# Altium PCB DIOT_Sampler 20spacin.PCBDOC (part 6 of 8)
Units mm, origin at the board's own origin, x right, y up, seen from the top; angles counter-clockwise.
Board outline 222.37 x 100 mm, 4 copper layers (Top, GP1(GND), L3, Bot), stack 1.648 mm thick; 680 components, 424 nets, 2212 pads, 808 vias.
Unrouted connection lines stored in the file: 327.
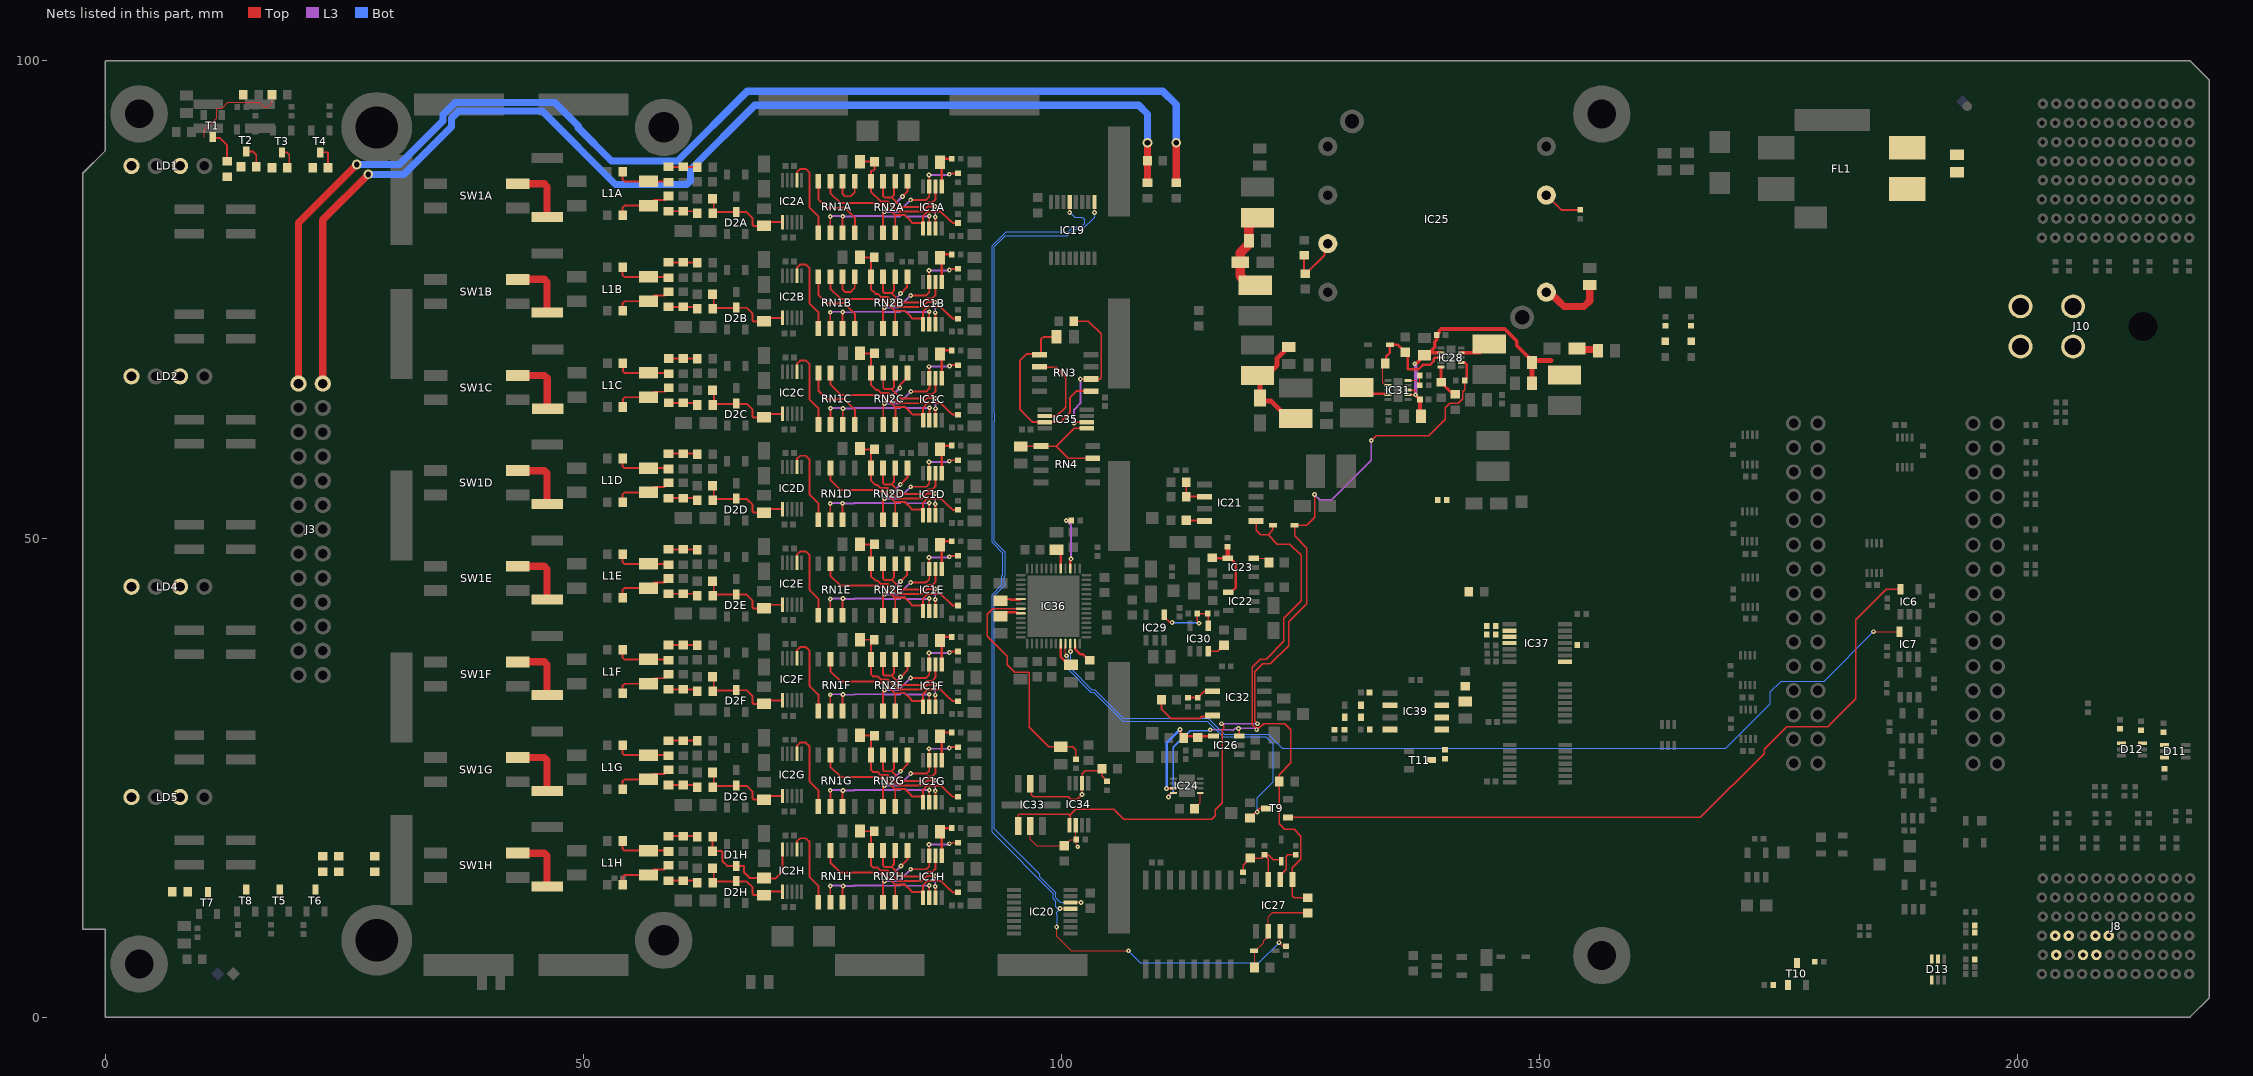
[diagram p7: the nets of this part, all layers, seen from the top]

## Via types
v1: diameter 0.5, hole 0.2, Top to Bot, tented both sides, 765 vias
v2: diameter 0.6, hole 0.3, Top to Bot, tented both sides, 17 vias
v3: diameter 0.5, hole 0.2, Top to Bot, 11 vias
v4: diameter 1, hole 0.6, Top to Bot, tented both sides, 7 vias
v5: diameter 0.6, hole 0.3, Top to Bot, 6 vias
v6: diameter 1.27, hole 0.711, Top to Bot, 2 vias

## Nets (pads, with @x,y where several pads share a name; then routed paths per layer and width w, separated by ;. In a path a pad name is that pad's centre, name@x,y a point inside that pad or via, vN(x,y) a via of type N, cw(c..) or ccw(c..) an arc to the next point about the centre after c; other vN are vias at no path point) (continued)
NetC1H_2: C1H.2 C2H.2 D1H.3 IC2H.10 R3H.2 | length 13.5
  Top w0.203: R3H.2@63.532,18.872 C1H.2@63.532,17.348 64.473,17.348 64.553,17.268 64.553,16.318 65.053,15.818 D1H.3@66.003,15.818 66.772,15.818 66.816,15.774 66.816,15.139 67.415,14.54 C2H.2@68.899,14.54 68.935,14.504 70.118,14.504 70.845,15.231 IC2H.10@70.845,17.517
NetC2A_1: C2A.1 C5A.2 D2A.3 IC2A.1 R10A.2 | length 9.7
  Top w0.203: C5A.2@63.652,85.45 63.652,84.166 65.963,84.166 D2A.3@65.969,84.172 ; D2A.3@66.003,84.206 D2A.3@65.969,84.172 ; IC2A.1@70.845,83.117 69.275,83.117 C2A.1@68.899,82.74 67.819,82.74 67.712,82.848 67.712,83.554 67.094,84.172 D2A.3@65.969,84.172
NetC2B_1: C2B.1 C5B.2 D2B.3 IC2B.1 R10B.2 | length 9.7
  Top w0.203: C5B.2@63.652,75.45 63.652,74.166 65.963,74.166 D2B.3@65.969,74.172 ; D2B.3@66.003,74.206 D2B.3@65.969,74.172 ; IC2B.1@70.845,73.117 69.275,73.117 C2B.1@68.899,72.74 67.819,72.74 67.712,72.848 67.712,73.554 67.094,74.172 D2B.3@65.969,74.172
NetC2C_1: C2C.1 C5C.2 D2C.3 IC2C.1 R10C.2 | length 9.7
  Top w0.203: C5C.2@63.665,65.406 63.665,64.122 65.976,64.122 D2C.3@65.982,64.128 ; D2C.3@66.016,64.162 D2C.3@65.982,64.128 ; IC2C.1@70.858,63.073 69.288,63.073 C2C.1@68.911,62.697 67.832,62.697 67.724,62.804 67.724,63.51 67.106,64.128 D2C.3@65.982,64.128
NetC2D_1: C2D.1 C5D.2 D2D.3 IC2D.1 R10D.2 | length 9.7
  Top w0.203: C5D.2@63.652,55.45 63.652,54.166 65.963,54.166 D2D.3@65.969,54.172 ; D2D.3@66.003,54.206 D2D.3@65.969,54.172 ; IC2D.1@70.845,53.117 69.275,53.117 C2D.1@68.899,52.74 67.819,52.74 67.712,52.848 67.712,53.554 67.094,54.172 D2D.3@65.969,54.172
NetC2E_1: C2E.1 C5E.2 D2E.3 IC2E.1 R10E.2 | length 9.7
  Top w0.203: C5E.2@63.652,45.45 63.652,44.166 65.963,44.166 D2E.3@65.969,44.172 ; D2E.3@66.003,44.206 D2E.3@65.969,44.172 ; IC2E.1@70.845,43.117 69.275,43.117 C2E.1@68.899,42.74 67.819,42.74 67.712,42.848 67.712,43.554 67.094,44.172 D2E.3@65.969,44.172
NetC2F_1: C2F.1 C5F.2 D2F.3 IC2F.1 R10F.2 | length 9.7
  Top w0.203: C5F.2@63.652,35.45 63.652,34.166 65.963,34.166 D2F.3@65.969,34.172 ; D2F.3@66.003,34.206 D2F.3@65.969,34.172 ; IC2F.1@70.845,33.117 69.275,33.117 C2F.1@68.899,32.74 67.819,32.74 67.712,32.848 67.712,33.554 67.094,34.172 D2F.3@65.969,34.172
NetC2G_1: C2G.1 C5G.2 D2G.3 IC2G.1 R10G.2 | length 9.7
  Top w0.203: C5G.2@63.652,25.45 63.652,24.166 65.963,24.166 D2G.3@65.969,24.172 ; D2G.3@66.003,24.206 D2G.3@65.969,24.172 ; IC2G.1@70.845,23.117 69.275,23.117 C2G.1@68.899,22.74 67.819,22.74 67.712,22.848 67.712,23.554 67.094,24.172 D2G.3@65.969,24.172
NetC2H_1: C2H.1 C5H.2 D2H.3 IC2H.1 R10H.2 | length 9.7
  Top w0.203: C5H.2@63.652,15.45 63.652,14.166 65.963,14.166 D2H.3@65.969,14.172 ; D2H.3@66.003,14.206 D2H.3@65.969,14.172 ; IC2H.1@70.845,13.117 69.275,13.117 C2H.1@68.899,12.74 67.819,12.74 67.712,12.848 67.712,13.554 67.094,14.172 D2H.3@65.969,14.172
NetC3A_2: C3A.2 IC1A.3 R7A.2 RN2A.1 RN2A.4 | length 18.6
  Top w0.203: C3A.2@78.939,89.205 C3A.2@78.939,89.455 80.439,89.455 R7A.2@80.464,89.43 80.464,88.655 80.309,88.5 80.094,88.5 RN2A.4@80.094,87.405 80.094,86.325 81.114,85.305 81.864,85.305 v1@82.264,84.905 ; v1(82.314,84.905) v1@82.264,84.905 ; v1(83.389,85.805) 83.904,86.32 RN2A.1@83.904,87.405 ; v1(86.814,84.755) 85.964,84.755 85.439,84.23 82.939,84.23 v1@82.264,84.905 ; v1(86.818,83.659) 86.839,83.638 IC1A.3@86.839,82.459
  L3 w0.203: v1(82.314,84.905) 82.489,84.905 v1(83.389,85.805) ; v1(86.814,84.755) 86.818,84.751 v1(86.818,83.659)
NetC3B_2: C3B.2 IC1B.3 R7B.2 RN2B.1 RN2B.4 | length 18.2
  Top w0.203: C3B.2@78.939,79.455 78.964,79.43 80.414,79.43 80.094,79.11 RN2B.4@80.094,77.405 80.094,76.105 80.573,75.626 80.793,75.626 81.114,75.305 81.864,75.305 v1(82.402,74.768) 82.939,74.23 85.439,74.23 85.964,74.755 v1(86.814,74.755) ; v1(83.189,75.655) 83.839,76.305 83.839,77.34 RN2B.1@83.904,77.405 ; v1(86.818,73.659) 86.839,73.638 IC1B.3@86.839,72.459
  L3 w0.203: v1(82.402,74.768) 82.402,74.868 v1(83.189,75.655) ; v1(86.814,74.755) 86.818,74.751 v1(86.818,73.659)
NetC3C_2: C3C.2 IC1C.3 R7C.2 RN2C.1 RN2C.4 | length 18.1
  Top w0.203: C3C.2@78.952,69.411 78.958,69.405 R7C.2@80.464,69.405 80.107,69.048 RN2C.4@80.107,67.362 80.107,66.08 80.604,65.583 80.805,65.583 81.127,65.261 81.877,65.261 82.952,64.186 85.452,64.186 85.977,64.711 v1(86.827,64.711) ; v1(83.114,65.78) 83.114,66.08 83.917,66.883 RN2C.1@83.917,67.362 ; v1(86.831,63.615) 86.852,63.595 IC1C.3@86.852,62.415
  L3 w0.203: v1(82.264,64.93) v1(83.114,65.78) ; v1(86.827,64.711) 86.831,64.707 v1(86.831,63.615)
NetC3D_2: C3D.2 IC1D.3 R7D.2 RN2D.1 RN2D.4 | length 18.2
  Top w0.203: C3D.2@78.939,59.455 79.039,59.355 R7D.2@80.464,59.355 80.094,58.985 RN2D.4@80.094,57.405 80.094,56.13 80.598,55.626 80.793,55.626 81.114,55.305 81.864,55.305 v1(82.289,54.88) 82.939,54.23 85.439,54.23 85.964,54.755 v1(86.814,54.755) ; v1(83.164,55.68) 83.904,56.42 RN2D.1@83.904,57.405 ; v1(86.818,53.659) 86.839,53.638 IC1D.3@86.839,52.459
  L3 w0.203: v1(82.289,54.88) 82.364,54.88 v1(83.164,55.68) ; v1(86.814,54.755) 86.818,54.751 v1(86.818,53.659)
NetC3E_2: C3E.2 IC1E.3 R7E.2 RN2E.1 RN2E.4 | length 18.3
  Top w0.203: C3E.2@78.939,49.455 78.964,49.43 R7E.2@80.464,49.43 80.094,49.06 RN2E.4@80.094,47.405 80.094,46.105 80.573,45.626 80.793,45.626 81.114,45.305 81.864,45.305 82.939,44.23 85.439,44.23 85.964,44.755 v1(86.814,44.755) ; v1(83.189,45.555) 83.864,46.23 83.864,47.365 RN2E.1@83.904,47.405 ; v1(86.818,43.659) 86.839,43.638 IC1E.3@86.839,42.459
  L3 w0.203: v1(82.364,44.88) 82.514,44.88 v1(83.189,45.555) ; v1(86.814,44.755) 86.818,44.751 v1(86.818,43.659)
NetC3F_2: C3F.2 IC1F.3 R7F.2 RN2F.1 RN2F.4 | length 18.4
  Top w0.203: C3F.2@78.939,39.455 R7F.2@80.439,39.455 80.094,39.11 RN2F.4@80.094,37.405 80.094,35.85 80.318,35.626 80.793,35.626 81.114,35.305 81.864,35.305 82.939,34.23 85.439,34.23 85.964,34.755 v1(86.814,34.755) ; v1(83.189,35.555) 83.904,36.27 RN2F.1@83.904,37.405 ; v1(86.818,33.659) 86.839,33.638 IC1F.3@86.839,32.459
  L3 w0.203: v1(82.499,34.705) 82.499,34.865 v1(83.189,35.555) ; v1(86.814,34.755) 86.818,34.751 v1(86.818,33.659)
NetC3G_2: C3G.2 IC1G.3 R7G.2 RN2G.1 RN2G.4 | length 18.4
  Top w0.203: C3G.2@78.939,29.455 78.964,29.43 R7G.2@80.464,29.43 80.094,29.06 RN2G.4@80.094,27.405 80.094,25.85 80.318,25.626 80.793,25.626 81.114,25.305 81.864,25.305 v1(82.314,24.855) 82.939,24.23 85.439,24.23 85.964,24.755 v1(86.814,24.755) ; v1(83.189,25.705) 83.904,26.42 RN2G.1@83.904,27.405 ; v1(86.818,23.659) 86.839,23.638 IC1G.3@86.839,22.459
  L3 w0.203: v1(82.314,24.855) 82.339,24.855 v1(83.189,25.705) ; v1(86.814,24.755) 86.818,24.751 v1(86.818,23.659)
NetC3H_2: C3H.2 IC1H.3 R7H.2 RN2H.1 RN2H.4 | length 18.3
  Top w0.203: C3H.2@78.964,19.43 R7H.2@80.439,19.43 80.094,19.085 RN2H.4@80.094,17.405 80.094,15.85 80.318,15.626 80.793,15.626 81.114,15.305 81.864,15.305 82.939,14.23 85.439,14.23 85.964,14.755 v1(86.814,14.755) ; v1(83.239,15.805) 83.904,16.47 RN2H.1@83.904,17.405 ; v1(86.818,13.659) 86.839,13.638 IC1H.3@86.839,12.459
  L3 w0.203: v1(82.264,14.955) 82.389,14.955 v1(83.239,15.805) ; v1(86.814,14.755) 86.818,14.751 v1(86.818,13.659)
NetC12A_2: C12A.2 IC1A.5 R13A.2 | length 4
  Top w0.254: IC1A.5@87.489,86.859 87.489,89.205 C12A.2@87.314,89.38 87.689,89.755 R13A.2@88.544,89.755
NetC12B_2: C12B.2 IC1B.5 R13B.2 | length 4
  Top w0.254: IC1B.5@87.489,76.859 87.489,79.205 C12B.2@87.314,79.38 87.689,79.755 R13B.2@88.544,79.755
NetC12C_2: C12C.2 IC1C.5 R13C.2 | length 4
  Top w0.254: IC1C.5@87.502,66.815 87.502,69.161 C12C.2@87.327,69.336 87.702,69.711 R13C.2@88.557,69.711
NetC12D_2: C12D.2 IC1D.5 R13D.2 | length 4
  Top w0.254: IC1D.5@87.489,56.859 87.489,59.205 C12D.2@87.314,59.38 87.689,59.755 R13D.2@88.544,59.755
NetC12E_2: C12E.2 IC1E.5 R13E.2 | length 4
  Top w0.254: IC1E.5@87.489,46.859 87.489,49.205 C12E.2@87.314,49.38 87.689,49.755 R13E.2@88.544,49.755
NetC12F_2: C12F.2 IC1F.5 R13F.2 | length 4
  Top w0.254: IC1F.5@87.489,36.859 87.489,39.205 C12F.2@87.314,39.38 87.689,39.755 R13F.2@88.544,39.755
NetC12G_2: C12G.2 IC1G.5 R13G.2 | length 4
  Top w0.254: IC1G.5@87.489,26.859 87.489,29.205 C12G.2@87.314,29.38 87.689,29.755 R13G.2@88.544,29.755
NetC12H_2: C12H.2 IC1H.5 R13H.2 | length 4
  Top w0.254: IC1H.5@87.489,16.859 87.489,19.205 C12H.2@87.314,19.38 87.689,19.755 R13H.2@88.544,19.755
NetC40_1: C40.1 IC21.4 | length 1.9
  Top w0.203: C40.1@113.064,51.93 114.908,51.93 IC21.4@114.963,51.874
NetC42_1: C42.1 IC23.3 | length 1.8
  Top w0.127: IC23.3@120.114,47.969 121.298,47.969 121.71,47.557 C42.1@121.71,47.535
NetC46_1: C46.1 IC24.5 | length 1.9
  Top w0.127: C46.1@113.939,21.78 113.939,21.805 114.539,22.405 IC24.5@114.539,23.434
NetC49_2: C49.2 C50.1 L2.2 L3.1 | length 8.8
  Top w1.016: L3.1@120.264,76.53 119.639,76.53 118.714,77.455 C50.1@118.714,78.93 118.714,79.93 119.614,80.83 C49.2@119.614,81.18 119.614,82.68 L2.2@120.514,83.58
NetC52_1: C52.1 C53.2 C54.2 C55.2 C56.2 C73.2 C74.2 C85.2 C86.2 IC25.1 IC28.2 IC31.2 L4.2 | length 39.2
  Top w0.152: IC31.2@136.261,65.07 v1(137.051,65.07) 137.051,65.48 136.961,65.57 136.261,65.57
  Top w0.381: v1(136.961,68.32) 137.093,68.32 C74.2@137.979,69.205 138.215,69.205 C74.2@138.474,69.465 ; v1(137.051,65.07) 137.051,65.03 C85.2@137.511,64.57 137.511,62.92 C86.2@137.611,62.82 ; IC28.2@139.712,69.465 C74.2@138.474,69.465 ; C55.2@149.223,68.451 149.223,68.626 147.63,70.219 147.63,70.689 146.372,71.947 139.719,71.947 139.533,71.761 139.533,71.592 C73.2@139.261,71.32 139.261,70.845 139.045,70.629 139.045,70.036 C74.2@138.474,69.465
  Top w0.508: C56.2@149.223,66.292 C55.2@149.223,68.451 149.435,68.663 151.23,68.663
  Top w0.762: IC25.1@150.724,75.795 151.059,75.795 152.005,74.849 152.028,74.849 152.566,74.31 154.663,74.31 155.264,74.911 C53.2@155.264,76.53 ; C52.1@153.643,69.93 C52.1@153.918,69.93 154.043,69.805 155.989,69.805 C54.2@156.114,69.68
  L3 w0.381: v1(136.961,68.32) 136.961,68.287 137.051,68.197 v1(137.051,65.07)
NetC59_2: C59.2 C60.2 L5.2 L6.1 | length 12
  Top w0.508: L6.1@120.514,67.08 L6.1@121.014,67.08 ; C59.2@123.764,70.08 122.564,68.88 122.564,68.18 121.464,67.08 L6.1@121.014,67.08 ; L5.2@124.514,62.58 123.764,62.58 121.914,64.43 121.064,64.43 C60.2@120.764,64.73 120.764,66.83 L6.1@121.014,67.08
NetC65_2: C65.2 D7.2 IC27.3 R59.2 R62.2 | length 8.1
  Top w0.152: R62.2@119.014,15.15 119.014,15.88 C65.2@119.764,16.63 120.934,16.63 R59.2@121.264,16.96 ; IC27.3@121.629,14.38 121.629,16.565 121.289,16.905 121.689,16.905 122.164,16.43 122.874,16.43 D7.2@123.014,16.29
NetC66_2: C66.2 D8.2 IC28.3 IC31.7 R64.1 | length 13.1
  Top w0.127: R64.1@133.861,68.345 133.886,68.32 133.948,68.32 134.011,68.32 133.948,68.257 133.62,67.929 133.62,66.341 133.805,66.156 134.074,66.156 IC31.7@134.161,66.07
  Top w0.254: R64.1@133.861,68.345 133.923,68.407 133.968,68.452 133.968,69.077 134.358,69.467 134.358,70.313 D8.2@134.351,70.32 ; D8.2@134.358,70.32 135.161,70.32 C66.2@135.961,69.52 136.211,69.27 136.211,67.82 136.288,67.743 137.346,67.743 137.803,68.199 138.557,68.199 138.933,68.575 138.933,68.82 139.078,68.965 IC28.3@139.712,68.965
NetC72_2: C72.2 D9.2 IC27.6 R67.1 | length 10.5
  Top w0.127: C72.2@120.214,5.18 120.214,6.84 D9.2@120.124,6.93 120.289,6.93 121.149,7.79 121.149,7.962 121.407,8.221 121.58,8.221 121.629,8.27 IC27.6@121.629,8.98 121.629,10.47 122.039,10.88
  Top w0.152: 122.039,10.88 R67.1@125.764,10.88
NetC75_1: C75.1 IC30.3 | length 1.9
  Top w0.152: IC30.3@115.365,38.229 116.363,38.229 C75.1@117.014,38.88
NetC82_1: C82.1 IC32.4 | length 6.9
  Top w0.203: C82.1@110.464,33.18 110.464,32.23 111.493,31.201 114.462,31.201 114.691,31.43 115.719,31.43 IC32.4@115.814,31.525
NetC95_2: C95.2 IC36.22 | length 2.4
  Top w0.254: IC36.22@99.934,39.04 99.934,37.661 100.319,37.275 100.663,37.275 C95.2@100.78,37.158
NetC96_2: C96.2 IC36.9 | length 2.3
  Top w0.254: C96.2@93.639,41.916 94.034,42.311 95.318,42.311 95.414,42.215 IC36.9@95.759,42.215
NetC97_2: C97.2 IC36.6 | length 2.3
  Top w0.254: C97.2@93.639,43.545 93.809,43.715 94.625,43.715 94.705,43.635 95.679,43.635 IC36.6@95.759,43.715
NetC98_2: C98.2 IC36.45 | length 2.2
  Top w0.254: C98.2@99.485,48.871 99.934,48.421 IC36.45@99.934,46.89
NetC99_2: C99.2 IC36.8 R81.2 | length 25
  Top w0.152: IC36.8@95.759,42.715 94.81,42.715 94.764,42.67 92.83,42.67 92.264,42.104 92.264,39.821 94.367,37.718 94.367,36.827 95.134,36.06 96.535,36.06 96.654,35.941 96.654,30.29 98.692,28.252 C99.2@99.944,28.252 101.192,28.252 101.518,27.926 R81.2@101.518,26.958
NetC101_2: C101.2 IC33.2 IC34.2 R80.2 | length 9.1
  Top w0.127: IC33.2@96.764,19.984 96.764,18.585 97.433,17.916 100.309,17.916 100.721,18.328 100.721,18.353 100.931,18.563 R80.2@101.434,18.563 ; IC34.2@101.514,20.055 101.514,18.643 R80.2@101.434,18.563 ; v1(101.714,17.809) 101.714,17.91 101.582,18.042 R80.2@101.582,18.563 R80.2@101.434,18.563
NetC102_2: C102.2 IC33.6 IC34.6 R82.1 | length 12.9
  Top w0.152: IC33.6@96.764,24.384 96.871,24.277 96.871,23.261 97.096,23.036 100.716,23.036 100.985,22.767 101.67,22.767 v1(102.164,23.261) IC34.6@102.164,24.455 102.164,25.416 102.514,25.766 104.071,25.766 C102.2@104.264,25.959 104.264,25.18 104.769,24.675 R82.1@104.789,24.675 R82.1@104.809,24.675
NetC103_2: C103.2 IC35.3 RN3.1 RN3.5 | length 21.1
  Top w0.203: C103.2@99.514,71.13 98.139,71.13 97.864,70.855 97.864,69.41 RN3.5@97.714,69.26 97.644,69.33 96.339,69.33 95.66,68.651 95.66,63.559 97.014,62.205 IC35.3@98.264,62.205 99.864,62.205 100.914,63.255 100.914,64.805 101.559,65.45 RN3.1@103.114,65.45
NetC106_2: C106.2 IC35.5 RN4.3 RN4.5 | length 12
  Top w0.152: C106.2@95.764,59.68 99.464,59.68 ; IC35.5@102.664,61.555 101.339,61.555 99.464,59.68 ; RN4.3@103.289,58.44 100.704,58.44 99.464,59.68
NetC109_2: C109.2 IC39.6 IC39.7 R112.2
NetC111_2: C111.2 IC39.5
NetC112_2: C112.2 D15.1 R113.2
NetC116_1: C116.1 FL1.3 J10.1 J10.2
NetC116_2: C116.2 FL1.1 J10.3 J10.4
NetD10_1: D10.1 IC28.7 IC33.1 IC34.1 R69.1 R157.1 | length 93
  Top w0.152: IC33.1@95.494,19.984 95.494,21.134 95.583,21.223 100.72,21.223 100.913,21.03 ; IC34.1@100.913,20.128 100.913,21.03 ; v1(116.764,30.68) 116.987,30.457 116.987,30.158 116.85,30.022 116.85,22.419 116.088,21.656 116.088,21.03 115.752,20.694 106.536,20.694 105.5,21.73 101.493,21.73 100.913,21.151 100.913,21.03 ; v1(120.514,30.68) 120.514,30.722 120.236,31 120.236,36.116 121.07,36.95 121.87,36.95 123.764,38.844 123.764,41.327 125.67,43.233 125.67,49.04 124.404,50.306 D10.1@124.404,51.43 125.666,51.43 126.522,52.286 126.522,54.586 v1(126.473,54.634) ; v1(132.411,60.279) 132.431,60.279 132.944,60.792 138.439,60.792 140.164,62.517 140.164,63.71 140.627,64.173 141.501,64.173 141.99,64.661 141.99,65.403 142.181,65.594 R69.1@142.181,66.57
  Top w0.254: IC28.7@141.812,68.465 142.181,68.465 142.181,68.431 142.244,68.369 142.268,68.369 142.416,68.22 142.416,66.805 R69.1@142.181,66.57
  L3 w0.152: v1(116.764,30.68) v1(120.514,30.68) ; v1(126.473,54.634) 127.003,54.105 128.29,54.105 132.411,58.226 v1(132.411,60.279)
NetD10_2: D10.2 IC21.5 IC24.4 IC26.3 IC27.1 R53.1 R67.2 | length 71.2
  Top w0.152: v1(111.197,23.023) 111.197,23.117 111.514,23.434 IC24.4@111.739,23.434 ; v1(118.514,30.18) 118.614,30.08 IC26.3@118.614,29.38 ; IC21.5@120.363,51.874 120.363,50.903 120.836,50.43 121.614,50.43 ; D10.2@122.124,51.43 122.124,50.94 121.614,50.43 ; R67.2@126.014,12.73 R67.2@125.764,12.48 124.364,12.48 124.169,12.675 IC27.1@124.169,14.38 124.169,15.635 125.027,16.493 125.027,18.917 124.332,19.612 123.382,19.612 122.789,20.205 122.789,21.505 R53.1@122.789,24.63 122.789,25.355 124.014,26.58 124.014,30.03 123.364,30.68 121.155,30.68 120.702,30.227 120.326,30.227 119.967,30.586 119.967,30.873 119.956,30.884 119.956,36.588 120.798,37.43 121.414,37.43 123.272,39.288 123.272,41.292 123.272,41.688 125.098,43.514 125.098,48.266 123.9,49.464 122.58,49.464 121.614,50.43
  L3 w0.152: v1(115.569,30.032) 117.821,30.032 117.856,29.997 117.983,29.997 118.166,30.18 v1(118.514,30.18) 120.279,30.18 120.406,30.053 v1(120.43,30.053)
  Bot w0.152: v1(111.197,23.023) 111.723,23.549 111.723,28.189 113.473,29.939 115.48,29.939 115.569,30.029 v1(115.569,30.032)
NetD11_4: D11.4 J8.H2 R93.2
NetD11_6: D11.6 J8.K2 R98.2
NetD12_3: D12.3 J8.H3 R48.2
NetD12_4: D12.4 J8.I2 R95.2
NetD13_1: D13.1 J8.G3 R92.2
NetD13_5: D13.5 J8.K3 R97.2
NetD13_6: D13.6 J8.J3 R96.2
NetD14_2: D14.2 D15.2 IC39.2
NetIC1A_1: IC1A.1 R6A.1 RN1A.7 RN2A.7 | length 19.7
  Top w0.203: RN1A.7@75.858,87.407 75.858,86.161 76.914,85.105 80.847,85.105 80.977,84.975 81.48,84.975 82.634,83.82 ; RN2A.7@82.634,82.005 82.634,83.82 ; IC1A.1@85.539,82.459 IC1A.1@85.539,83.056 ; R6A.1@89.173,83.036 88.643,83.036 88.423,83.256 88.363,83.256 87.385,84.234 85.991,84.234 85.539,83.782 IC1A.1@85.539,83.056 ; 82.634,83.82 82.673,83.859 83.637,83.859 84.235,83.261 84.235,83.22 84.399,83.056 IC1A.1@85.539,83.056
NetIC1A_2: IC1A.2 RN1A.2 RN1A.3 | length 15
  Top w0.203: v1(75.839,83.705) 75.839,82.027 RN1A.2@75.858,82.007 ; RN1A.3@77.128,82.007 77.128,83.719 v1(77.139,83.73) ; IC1A.2@86.189,82.459 v1(86.189,83.755)
  L3 w0.203: v1(75.839,83.705) 75.889,83.755 76.862,83.755 ; v1@77.139,83.701 78.31,83.701 78.364,83.755 81.273,83.755 81.301,83.727 83.109,83.727 83.241,83.859 83.637,83.859 83.769,83.727 86.161,83.727 v1(86.189,83.755)
NetIC1A_6: IC1A.6 RN2A.2 RN2A.3 | length 11.1
  Top w0.203: RN2A.3@81.364,87.405 81.364,85.84 81.499,85.705 82.249,85.705 ; RN2A.2@82.634,87.405 82.499,87.27 82.499,85.955 82.249,85.705 ; IC1A.6@86.839,86.859 86.839,85.484 86.514,85.159 86.035,85.159 85.961,85.085 85.827,85.085 85.447,84.705 83.249,84.705 82.249,85.705
NetIC1A_7: IC1A.7 R12A.1 RN2A.6 | length 13
  Top w0.203: RN2A.6@81.364,82.005 81.364,84.07 v1(81.499,84.205) ; v1(84.249,85.455) 85.864,85.455 86.189,85.78 IC1A.7@86.189,86.859 86.189,88.03 v1(86.164,88.055) ; v1(88.289,88.13) 88.385,88.226 R12A.1@89.173,88.226
  L3 w0.203: v1(81.499,84.205) 82.999,84.205 v1(84.249,85.455) ; v1(86.164,88.055) 88.214,88.055 v1(88.289,88.13)
NetIC1B_1: IC1B.1 R6B.1 RN1B.7 RN2B.7 | length 19.7
  Top w0.203: RN1B.7@75.858,77.407 75.858,76.161 76.914,75.105 80.847,75.105 80.977,74.975 81.48,74.975 82.634,73.82 ; RN2B.7@82.634,72.005 82.634,73.82 ; IC1B.1@85.539,72.459 IC1B.1@85.539,73.056 ; R6B.1@89.173,73.036 88.643,73.036 88.423,73.256 88.363,73.256 87.385,74.234 85.991,74.234 85.539,73.782 IC1B.1@85.539,73.056 ; 82.634,73.82 82.673,73.859 83.637,73.859 84.235,73.261 84.235,73.22 84.399,73.056 IC1B.1@85.539,73.056
NetIC1B_2: IC1B.2 RN1B.2 RN1B.3 | length 15
  Top w0.203: v1(75.839,73.705) 75.839,72.027 RN1B.2@75.858,72.007 ; RN1B.3@77.128,72.007 77.128,73.719 v1(77.139,73.73) ; IC1B.2@86.189,72.459 v1(86.189,73.755)
  L3 w0.203: v1(75.839,73.705) 75.889,73.755 76.862,73.755 ; v1@77.139,73.701 78.31,73.701 78.364,73.755 81.273,73.755 81.301,73.727 83.109,73.727 83.241,73.859 83.637,73.859 83.769,73.727 86.161,73.727 v1(86.189,73.755)
NetIC1B_6: IC1B.6 RN2B.2 RN2B.3 | length 11.1
  Top w0.203: RN2B.3@81.364,77.405 81.364,75.84 81.499,75.705 82.249,75.705 ; RN2B.2@82.634,77.405 82.499,77.27 82.499,75.955 82.249,75.705 ; IC1B.6@86.839,76.859 86.839,75.484 86.514,75.159 86.035,75.159 85.961,75.085 85.827,75.085 85.447,74.705 83.249,74.705 82.249,75.705
NetIC1B_7: IC1B.7 R12B.1 RN2B.6 | length 13
  Top w0.203: RN2B.6@81.364,72.005 81.364,74.07 v1(81.499,74.205) ; v1(84.249,75.455) 85.864,75.455 86.189,75.78 86.189,78.03 v1(86.164,78.055) ; v1(88.289,78.13) 88.385,78.226 R12B.1@89.173,78.226
  L3 w0.203: v1(81.499,74.205) 82.999,74.205 v1(84.249,75.455) ; v1(86.164,78.055) 88.214,78.055 v1(88.289,78.13)
NetIC1C_1: IC1C.1 R6C.1 RN1C.7 RN2C.7 | length 19.7
  Top w0.203: RN1C.7@75.871,67.363 75.871,66.117 76.927,65.061 80.86,65.061 80.99,64.931 81.493,64.931 82.647,63.777 ; RN2C.7@82.647,61.962 82.647,63.777 ; IC1C.1@85.552,62.415 IC1C.1@85.552,63.012 ; R6C.1@89.186,62.992 88.656,62.992 88.436,63.212 88.375,63.212 87.398,64.19 86.003,64.19 85.552,63.738 IC1C.1@85.552,63.012 ; 82.647,63.777 82.685,63.815 83.65,63.815 84.247,63.217 84.247,63.176 84.411,63.012 IC1C.1@85.552,63.012
NetIC1C_2: IC1C.2 RN1C.2 RN1C.3 | length 14.9
  Top w0.203: v1(75.852,63.661) 75.852,61.983 RN1C.2@75.871,61.963 ; RN1C.3@77.141,61.963 77.141,63.607 v1(77.164,63.63) ; IC1C.2@86.202,62.415 v1(86.202,63.711)
  L3 w0.203: v1(75.852,63.661) 75.902,63.711 76.875,63.711 ; v1@77.164,63.658 78.323,63.658 78.377,63.711 81.286,63.711 81.314,63.683 83.122,63.683 83.253,63.815 83.65,63.815 83.782,63.683 86.173,63.683 v1(86.202,63.711)
NetIC1C_6: IC1C.6 RN2C.2 RN2C.3 | length 11.1
  Top w0.203: RN2C.3@81.377,67.362 81.377,65.797 81.512,65.662 82.262,65.662 ; RN2C.2@82.647,67.362 82.512,67.227 82.512,65.912 82.262,65.662 ; IC1C.6@86.852,66.815 86.852,65.44 86.527,65.115 86.047,65.115 85.974,65.041 85.84,65.041 85.46,64.662 83.262,64.662 82.262,65.662
NetIC1C_7: IC1C.7 R12C.1 RN2C.6 | length 13
  Top w0.203: RN2C.6@81.377,61.962 81.377,64.027 v1(81.512,64.162) ; v1(84.262,65.412) 85.877,65.412 86.202,65.736 IC1C.7@86.202,66.815 86.202,67.986 v1(86.177,68.011) ; v1(88.302,68.086) 88.398,68.182 R12C.1@89.186,68.182
  L3 w0.203: v1(81.512,64.162) 83.012,64.162 v1(84.262,65.412) ; v1(86.177,68.011) 88.227,68.011 v1(88.302,68.086)
NetIC1D_1: IC1D.1 R6D.1 RN1D.7 RN2D.7 | length 19.7
  Top w0.203: RN1D.7@75.858,57.407 75.858,56.161 76.914,55.105 80.847,55.105 80.977,54.975 81.48,54.975 82.634,53.82 ; RN2D.7@82.634,52.005 82.634,53.82 ; IC1D.1@85.539,52.459 IC1D.1@85.539,53.056 ; R6D.1@89.173,53.036 88.643,53.036 88.423,53.256 88.363,53.256 87.385,54.234 85.991,54.234 85.539,53.782 IC1D.1@85.539,53.056 ; 82.634,53.82 82.673,53.859 83.637,53.859 84.235,53.261 84.235,53.22 84.399,53.056 IC1D.1@85.539,53.056
NetIC1D_2: IC1D.2 RN1D.2 RN1D.3 | length 15
  Top w0.203: v1(75.839,53.705) 75.839,52.027 RN1D.2@75.858,52.007 ; v1(77.114,53.73) 77.128,53.716 RN1D.3@77.128,52.007 ; IC1D.2@86.189,52.459 v1(86.189,53.755)
  L3 w0.203: v1(75.839,53.705) 75.889,53.755 76.862,53.755 ; v1@77.114,53.701 78.31,53.701 78.364,53.755 81.273,53.755 81.301,53.727 83.109,53.727 83.241,53.859 83.637,53.859 83.769,53.727 86.161,53.727 v1(86.189,53.755)
NetIC1D_6: IC1D.6 RN2D.2 RN2D.3 | length 11.1
  Top w0.203: RN2D.3@81.364,57.405 81.364,55.84 81.499,55.705 82.249,55.705 ; RN2D.2@82.634,57.405 82.499,57.27 82.499,55.955 82.249,55.705 ; IC1D.6@86.839,56.859 86.839,55.484 86.514,55.159 86.035,55.159 85.961,55.085 85.827,55.085 85.447,54.705 83.249,54.705 82.249,55.705
NetIC1D_7: IC1D.7 R12D.1 RN2D.6 | length 13
  Top w0.203: RN2D.6@81.364,52.005 81.364,54.07 v1(81.499,54.205) ; v1(84.249,55.455) 85.864,55.455 86.189,55.78 86.189,58.03 v1(86.164,58.055) ; v1(88.289,58.13) 88.385,58.226 R12D.1@89.173,58.226
  L3 w0.203: v1(81.499,54.205) 82.999,54.205 v1(84.249,55.455) ; v1(86.164,58.055) 88.214,58.055 v1(88.289,58.13)
NetIC1E_1: IC1E.1 R6E.1 RN1E.7 RN2E.7 | length 19.7
  Top w0.203: RN1E.7@75.858,47.407 75.858,46.161 76.914,45.105 80.847,45.105 80.977,44.975 81.48,44.975 82.634,43.82 ; RN2E.7@82.634,42.005 82.634,43.82 ; IC1E.1@85.539,42.459 IC1E.1@85.539,43.056 ; R6E.1@89.173,43.036 88.643,43.036 88.423,43.256 88.363,43.256 87.385,44.234 85.991,44.234 85.539,43.782 IC1E.1@85.539,43.056 ; 82.634,43.82 82.673,43.859 83.637,43.859 84.235,43.261 84.235,43.22 84.399,43.056 IC1E.1@85.539,43.056
NetIC1E_2: IC1E.2 RN1E.2 RN1E.3 | length 15.1
  Top w0.203: v1(75.839,43.705) 75.839,42.027 RN1E.2@75.858,42.007 ; RN1E.3@77.128,42.007 77.128,43.719 v1(77.164,43.755) ; IC1E.2@86.189,42.459 v1(86.189,43.755)
  L3 w0.203: v1(75.839,43.705) 75.889,43.755 76.862,43.755 76.916,43.701 ; v1@77.164,43.701 78.31,43.701 78.364,43.755 81.273,43.755 81.301,43.727 83.109,43.727 83.241,43.859 83.637,43.859 83.769,43.727 86.161,43.727 v1(86.189,43.755)
NetIC1E_6: IC1E.6 RN2E.2 RN2E.3 | length 11.1
  Top w0.203: RN2E.3@81.364,47.405 81.364,45.84 81.499,45.705 82.249,45.705 ; RN2E.2@82.634,47.405 82.499,47.27 82.499,45.955 82.249,45.705 ; IC1E.6@86.839,46.859 86.839,45.484 86.514,45.159 86.035,45.159 85.961,45.085 85.827,45.085 85.447,44.705 83.249,44.705 82.249,45.705
NetIC1E_7: IC1E.7 R12E.1 RN2E.6 | length 13
  Top w0.203: RN2E.6@81.364,42.005 81.364,44.07 v1(81.499,44.205) ; v1(84.249,45.455) 85.864,45.455 86.189,45.78 86.189,48.03 v1(86.164,48.055) ; v1(88.289,48.13) 88.385,48.226 R12E.1@89.173,48.226
  L3 w0.203: v1(81.499,44.205) 82.999,44.205 v1(84.249,45.455) ; v1(86.164,48.055) 88.214,48.055 v1(88.289,48.13)
NetIC1F_1: IC1F.1 R6F.1 RN1F.7 RN2F.7 | length 19.7
  Top w0.203: RN1F.7@75.858,37.407 75.858,36.161 76.914,35.105 80.847,35.105 80.977,34.975 81.48,34.975 82.634,33.82 ; RN2F.7@82.634,32.005 82.634,33.82 ; IC1F.1@85.539,32.459 IC1F.1@85.539,33.056 ; R6F.1@89.173,33.036 88.643,33.036 88.423,33.256 88.363,33.256 87.385,34.234 85.991,34.234 85.539,33.782 IC1F.1@85.539,33.056 ; 82.634,33.82 82.673,33.859 83.637,33.859 84.235,33.261 84.235,33.22 84.399,33.056 IC1F.1@85.539,33.056
NetIC1F_2: IC1F.2 RN1F.2 RN1F.3 | length 15
  Top w0.203: v1(75.839,33.705) 75.839,32.027 RN1F.2@75.858,32.007 ; RN1F.3@77.128,32.007 77.128,33.694 v1(77.164,33.73) ; IC1F.2@86.189,32.459 v1(86.189,33.755)
  L3 w0.203: v1(75.839,33.705) 75.889,33.755 76.862,33.755 76.916,33.701 ; v1@77.164,33.701 78.31,33.701 78.364,33.755 81.273,33.755 81.301,33.727 83.109,33.727 83.241,33.859 83.637,33.859 83.769,33.727 86.161,33.727 v1(86.189,33.755)
NetIC1F_6: IC1F.6 RN2F.2 RN2F.3 | length 11.1
  Top w0.203: RN2F.3@81.364,37.405 81.364,35.84 81.499,35.705 82.249,35.705 ; RN2F.2@82.634,37.405 82.499,37.27 82.499,35.955 82.249,35.705 ; IC1F.6@86.839,36.859 86.839,35.484 86.514,35.159 86.035,35.159 85.961,35.085 85.827,35.085 85.447,34.705 83.249,34.705 82.249,35.705
NetIC1F_7: IC1F.7 R12F.1 RN2F.6 | length 13
  Top w0.203: RN2F.6@81.364,32.005 81.364,34.07 v1(81.499,34.205) ; v1(84.249,35.455) 85.864,35.455 86.189,35.78 IC1F.7@86.189,36.859 86.189,38.03 v1(86.164,38.055) ; v1(88.289,38.13) 88.385,38.226 R12F.1@89.173,38.226
  L3 w0.203: v1(81.499,34.205) 82.999,34.205 v1(84.249,35.455) ; v1(86.164,38.055) 88.214,38.055 v1(88.289,38.13)
NetIC1G_1: IC1G.1 R6G.1 RN1G.7 RN2G.7 | length 19.7
  Top w0.203: RN1G.7@75.858,27.407 75.858,26.161 76.914,25.105 80.847,25.105 80.977,24.975 81.48,24.975 82.634,23.82 ; RN2G.7@82.634,22.005 82.634,23.82 ; IC1G.1@85.539,22.459 IC1G.1@85.539,23.056 ; R6G.1@89.173,23.036 88.643,23.036 88.423,23.256 88.363,23.256 87.385,24.234 85.991,24.234 85.539,23.782 IC1G.1@85.539,23.056 ; 82.634,23.82 82.673,23.859 83.637,23.859 84.235,23.261 84.235,23.22 84.399,23.056 IC1G.1@85.539,23.056
NetIC1G_2: IC1G.2 RN1G.2 RN1G.3 | length 15.3
  Top w0.203: v1(75.839,23.705) 75.868,23.676 75.868,22.757 75.839,22.728 75.839,22.027 RN1G.2@75.858,22.007 ; RN1G.3@77.128,22.007 77.128,23.666 v1(77.164,23.701) ; IC1G.2@86.189,22.459 v1(86.189,23.755)
  L3 w0.203: v1(75.839,23.705) 75.889,23.755 76.862,23.755 76.916,23.701 v1(77.164,23.701) 78.31,23.701 78.364,23.755 81.273,23.755 81.301,23.727 83.109,23.727 83.241,23.859 83.637,23.859 83.769,23.727 86.161,23.727 v1(86.189,23.755)
NetIC1G_6: IC1G.6 RN2G.2 RN2G.3 | length 11.1
  Top w0.203: RN2G.3@81.364,27.405 81.364,25.84 81.499,25.705 82.249,25.705 ; RN2G.2@82.634,27.405 82.499,27.27 82.499,25.955 82.249,25.705 ; IC1G.6@86.839,26.859 86.839,25.484 86.514,25.159 86.035,25.159 85.961,25.085 85.827,25.085 85.447,24.705 83.249,24.705 82.249,25.705
NetIC1G_7: IC1G.7 R12G.1 RN2G.6 | length 13
  Top w0.203: RN2G.6@81.364,22.005 81.364,24.07 v1(81.499,24.205) ; v1(84.249,25.455) 85.864,25.455 86.189,25.78 86.189,28.03 v1(86.164,28.055) ; v1(88.289,28.13) 88.385,28.226 R12G.1@89.173,28.226
  L3 w0.203: v1(81.499,24.205) 82.999,24.205 v1(84.249,25.455) ; v1(86.164,28.055) 88.214,28.055 v1(88.289,28.13)
NetIC1H_1: IC1H.1 R6H.1 RN1H.7 RN2H.7 | length 19.7
  Top w0.203: RN1H.7@75.858,17.407 75.858,16.161 76.914,15.105 80.847,15.105 80.977,14.975 81.48,14.975 82.634,13.82 ; RN2H.7@82.634,12.005 82.634,13.82 ; IC1H.1@85.539,12.459 IC1H.1@85.539,13.056 ; R6H.1@89.173,13.036 88.643,13.036 88.423,13.256 88.363,13.256 87.385,14.234 85.991,14.234 85.539,13.782 IC1H.1@85.539,13.056 ; 82.634,13.82 82.673,13.859 83.637,13.859 84.235,13.261 84.235,13.22 84.399,13.056 IC1H.1@85.539,13.056
NetIC1H_2: IC1H.2 RN1H.2 RN1H.3 | length 15.3
  Top w0.203: v1(75.839,13.705) 75.839,12.027 RN1H.2@75.858,12.007 ; RN1H.3@77.128,12.007 77.128,13.641 v1(77.189,13.701) ; IC1H.2@86.189,12.459 v1(86.189,13.755)
  L3 w0.203: v1(75.839,13.705) 75.889,13.755 76.862,13.755 76.916,13.701 v1(77.189,13.701) 78.31,13.701 78.364,13.755 81.273,13.755 81.301,13.727 83.109,13.727 83.241,13.859 83.637,13.859 83.769,13.727 86.161,13.727 v1(86.189,13.755)
NetIC1H_6: IC1H.6 RN2H.2 RN2H.3 | length 11.1
  Top w0.203: RN2H.3@81.364,17.405 81.364,15.84 81.499,15.705 82.249,15.705 ; RN2H.2@82.634,17.405 82.499,17.27 82.499,15.955 82.249,15.705 ; IC1H.6@86.839,16.859 86.839,15.484 86.514,15.159 86.035,15.159 85.961,15.085 85.827,15.085 85.447,14.705 83.249,14.705 82.249,15.705
NetIC1H_7: IC1H.7 R12H.1 RN2H.6 | length 13
  Top w0.203: RN2H.6@81.364,12.005 81.364,14.07 v1(81.499,14.205) ; v1(84.249,15.455) 85.864,15.455 86.189,15.78 86.189,18.03 v1(86.164,18.055) ; v1(88.289,18.13) 88.385,18.226 R12H.1@89.173,18.226
  L3 w0.203: v1(81.499,14.205) 82.999,14.205 v1(84.249,15.455) ; v1(86.164,18.055) 88.214,18.055 v1(88.289,18.13)
NetIC2A_7: IC2A.7 RN1A.1 | length 9.2
  Top w0.203: IC2A.7@72.345,87.517 72.345,88.365 72.675,88.695 73.293,88.695 73.645,88.343 73.645,84.66 74.588,83.717 RN1A.1@74.588,82.007
NetIC2B_7: IC2B.7 RN1B.1 | length 9.2
  Top w0.203: IC2B.7@72.345,77.517 72.345,78.365 72.675,78.695 73.293,78.695 73.645,78.343 73.645,74.66 74.588,73.717 RN1B.1@74.588,72.007
NetIC2C_7: IC2C.7 RN1C.1 | length 9.2
  Top w0.203: IC2C.7@72.358,67.473 72.358,68.321 72.688,68.651 73.306,68.651 73.658,68.299 73.658,64.616 74.601,63.673 RN1C.1@74.601,61.963
NetIC2D_7: IC2D.7 RN1D.1 | length 9.2
  Top w0.203: IC2D.7@72.345,57.517 72.345,58.365 72.675,58.695 73.293,58.695 73.645,58.343 73.645,54.66 74.588,53.717 RN1D.1@74.588,52.007
NetIC2E_7: IC2E.7 RN1E.1 | length 9.2
  Top w0.203: IC2E.7@72.345,47.517 72.345,48.365 72.675,48.695 73.293,48.695 73.645,48.343 73.645,44.66 74.588,43.717 RN1E.1@74.588,42.007
NetIC2F_7: IC2F.7 RN1F.1 | length 9.2
  Top w0.203: IC2F.7@72.345,37.517 72.345,38.365 72.675,38.695 73.293,38.695 73.645,38.343 73.645,34.66 74.588,33.717 RN1F.1@74.588,32.007
NetIC2G_7: IC2G.7 RN1G.1 | length 9.2
  Top w0.203: IC2G.7@72.345,27.517 72.345,28.365 72.675,28.695 73.293,28.695 73.645,28.343 73.645,24.66 74.588,23.717 RN1G.1@74.588,22.007
NetIC2H_7: IC2H.7 RN1H.1 | length 9.2
  Top w0.203: IC2H.7@72.345,17.517 72.345,18.365 72.675,18.695 73.293,18.695 73.645,18.343 73.645,14.66 74.588,13.717 RN1H.1@74.588,12.007
NetIC6_5: IC6.5 T9.1 | length 79
  Top w0.152: T9.1@123.699,20.867 166.825,20.867 173.487,27.529 173.487,27.994 175.854,30.362 180.162,30.362 183.086,33.286 183.086,41.553 186.255,44.722 IC6.5@187.743,44.722
NetIC7_5: IC7.5 IC36.24 | length 98.5
  Top w0.127: IC36.24@100.934,39.04 100.934,38.267 v1(100.969,38.232) ; v1(184.926,40.298) IC7.5@187.657,40.298
  Bot w0.127: v1(100.969,38.232) 100.969,36.452 103.182,34.24 103.487,34.24 106.487,31.24 115.344,31.24 117.025,29.558 121.636,29.558 123.111,28.083 169.456,28.083 174.139,32.766 174.139,34.008 175.268,35.136 179.765,35.136 v1(184.926,40.298)
NetIC19_9: IC19.9 IC20.14 | length 89.1
  Top w0.127: IC20.14@100.969,11.987 v1(102.071,11.987) ; v1(103.474,84.145) IC19.9@103.474,85.247
  Bot w0.127: v1(102.071,11.987) 99.894,11.987 99.426,12.454 99.426,13.018 97.764,14.68 97.764,14.93 93.01,19.684 93.01,44.08 94.145,45.215 94.145,45.351 94.047,45.45 94.047,46.042 94.145,46.141 94.145,48.629 93.01,49.764 93.01,62.324 93.013,62.327 93.013,63.133 93.01,63.136 93.01,80.541 94.153,81.684 100.645,81.684 101.331,82.37 102.187,82.37 103.474,83.657 v1(103.474,84.145)
NetIC19_13: IC19.13 IC20.13 IC27.7 R65.2 | length 119.1
  Top w0.127: v1(99.514,9.43) 99.514,8.43 101.014,6.93 v1(107.014,6.93) ; v1(99.867,11.337) IC20.13@100.969,11.337 ; v1(100.874,84.145) IC19.13@100.874,85.247 ; IC27.7@122.899,8.98 122.899,7.915 v1(122.764,7.78) 123.144,7.4 R65.2@123.514,7.4
  Bot w0.127: v1(99.514,9.43) 99.595,9.511 99.595,10.612 99.514,10.694 99.514,10.984 v1(99.867,11.337) 99.607,11.337 99.422,11.522 99.422,12.1 99.172,12.349 99.172,12.913 92.756,19.329 92.756,44.185 93.793,45.222 93.793,46.147 93.891,46.246 93.891,48.524 92.756,49.659 92.756,62.429 92.759,62.432 92.759,63.028 92.756,63.031 92.756,80.672 94.218,82.134 100.736,82.134 101.226,82.624 102.081,82.624 102.455,82.998 102.455,83.362 102.196,83.621 101.398,83.621 v1(100.874,84.145) ; v1(107.014,6.93) 108.264,5.68 120.664,5.68 v1(122.764,7.78)
NetIC21_2: IC21.2 R51.1 R52.2 | length 3.4
  Top w0.203: R52.2@113.064,55.93 R51.1@113.064,54.43 114.948,54.43 IC21.2@114.963,54.414
NetIC22_4: IC22.4 IC23.4 R54.1 R55.2 | length 7.4
  Top w0.254: R54.1@115.787,48.03 115.859,47.958 IC23.4@117.139,47.958 ; IC23.4@117.402,47.958 117.7,47.958 118.218,47.44 118.218,44.894 117.739,44.415 IC22.4@117.464,44.415
  Top w0.508: IC23.4@117.128,47.958 117.139,47.969 IC23.4@117.414,47.969 117.402,47.981 117.402,49.159 R55.2@117.389,49.171
NetIC24_3: IC24.3 IC26.4 R61.1 R63.2 | length 11.7
  Top w0.254: v1(111.008,23.905) 111.035,23.932 111.737,23.932 IC24.3@111.739,23.934 ; v1(112.407,30.08) 112.491,29.996 112.491,29.503 R63.2@112.814,29.18 113.014,29.38 IC26.4@115.914,29.38
  Bot w0.254: v1(111.008,23.905) 111.04,23.937 111.04,28.713 v1(112.407,30.08)
NetIC25_2: IC25.2 R57.2 | length 4.2
  Top w0.203: IC25.2@150.724,85.955 152.279,84.4 R57.2@154.264,84.4
NetIC25_6: IC25.6 R56.1 R58.2 | length 6.1
  Top w0.203: R58.2@125.383,79.649 125.383,77.861 R56.1@125.514,77.73 125.564,77.73 127.52,79.686 127.52,80.531 IC25.6@127.864,80.875
NetIC27_2: IC27.2 R60.1 | length 3.7
  Top w0.152: IC27.2@122.899,14.38 122.899,14.815 123.514,15.43 123.514,16.78 123.694,16.96 R60.1@124.514,16.96
NetIC28_5: IC28.5 R66.1 R68.2 | length 3.4
  Top w0.305: R68.2@139.711,66.37 140.961,65.12 R66.1@141.211,65.12 ; R68.2@139.712,66.619 IC28.5@139.712,67.965
NetIC28_9: IC28.9 L7.1 | length 3.3
  Top w0.33: IC28.9@141.812,69.465 143.815,69.465 L7.1@144.735,70.385
NetIC29_4: IC29.4 IC30.4 R70.1 R71.2 | length 7.6
  Top w0.152: IC29.4@110.764,42.082 110.764,41.807 111.312,41.259 v1(111.591,41.259) ; v1(114.391,41.182) 114.391,41.276 114.234,41.433 R70.1@114.234,42.18 R71.2@115.294,42.18 115.365,42.109 IC30.4@115.365,40.929
  Bot w0.152: v1(111.591,41.259) 111.63,41.221 114.352,41.221 v1(114.391,41.182)
NetIC31_3: IC31.3 R111.2
NetIC31_5: IC31.5 R72.1 R74.2 | length 2.4
  Top w0.127: IC31.5@136.261,66.57 136.991,66.57 R72.1@137.491,66.07 R74.2@137.491,67.07
NetIC31_9: IC31.9 L9.1 | length 3.6
  Top w0.127: L9.1@130.883,65.845 L9.1@131.572,65.156 ; IC31.9@134.074,65.156 IC31.9@134.161,65.07
  Top w0.254: L9.1@131.572,65.156 IC31.9@134.074,65.156
NetIC32_2: IC32.2 R73.1 R75.2 | length 2.8
  Top w0.203: R73.1@113.264,33.4 R75.2@114.264,33.4 114.929,34.065 IC32.2@115.814,34.065
NetIC35_2: IC35.2 RN3.6 | length 8.9
  Top w0.203: RN3.6@97.714,67.99 97.753,67.951 99.443,67.951 100.464,66.93 100.464,63.778 99.541,62.855 IC35.2@98.264,62.855
NetIC35_6: IC35.6 R83.1 RN3.2 | length 16.5
  Top w0.152: R83.1@101.314,72.78 102.839,72.78 104.164,71.455 104.164,66.855 104.029,66.72 RN3.2@103.114,66.72 ; v1(101.339,62.105) 101.439,62.205 IC35.6@102.664,62.205
  Top w0.203: v1(101.989,66.73) 101.999,66.72 RN3.2@103.114,66.72
  L3 w0.203: v1(101.339,62.105) 101.339,63.53 101.989,64.18 v1(101.989,66.73)
NetIC36_23: IC36.23 R76.2 T9.3 | length 38
  Top w0.127: IC36.23@100.434,39.04 100.434,38.095 100.528,38.001 v1(100.528,37.779)
  Top w0.152: R76.2@119.326,20.41 R76.2@119.729,20.814 120.733,21.817 T9.3@121.399,21.817
  Bot w0.127: v1(100.528,37.779) 100.715,37.592 100.715,36.347 103.076,33.986 103.381,33.986 106.42,30.947 115.276,30.947 116.92,29.304 121.39,29.304 122.164,28.53 122.164,24.591 120.479,22.906 v1(120.479,21.43)
NetIC36_25: IC36.25 R77.2 | length 2.4
  Top w0.254: IC36.25@101.434,39.04 101.473,39.001 101.473,38.434 101.952,37.955 102.239,37.955 R77.2@102.839,37.355
NetIC36_43: IC36.43 R78.1 | length 5.8
  Top w0.254: v1(100.514,51.93) R78.1@101.044,51.93 ; IC36.43@100.934,46.89 100.934,47.835 v1(101.014,47.915)
  L3 w0.254: v1(100.514,51.93) 101.014,51.43 v1(101.014,47.915)
NetIC37_1: IC37.1 IC37.11 R103.1 R105.1 R106.1
NetIC37_9: IC37.9 IC37.10 R105.2 R106.2 R108.2
NetIC39_4: IC39.4 R110.2
NetIC40_3: IC40.3 LD6.1 R116.1
NetIC40_7: IC40.7 R117.2
NetJ3_25: J3.25 R41.1 R45.1 | length 123.5
  Top w0.762: J3.25@22.77,66.24 22.77,83.359 v4(27.522,88.111) ; R41.1@109.014,87.23 v4(109.014,91.43)
  Bot w0.762: v4(27.522,88.111) 31.231,88.111 36.231,93.111 36.231,93.994 36.976,94.739 45.705,94.739 53.389,87.055 60.839,87.055 61.219,87.435 61.219,88.635 67.939,95.355 108.089,95.355 109.014,94.43 v4(109.014,91.43)
NetJ3_26: J3.26 R42.1 | length 128.6
  Top w0.762: J3.26@20.23,66.24 20.23,83.054 v4(26.328,89.152) ; R42.1@112.014,87.23 v4(112.014,91.43)
  Bot w0.762: v4(26.328,89.152) 30.773,89.152 35.342,93.721 35.342,94.362 36.608,95.628 47.016,95.628 49.472,93.172 49.472,93.004 52.954,89.522 59.867,89.522 67.168,96.823 110.621,96.823 112.014,95.43 v4(112.014,91.43)
NetL1A_3: L1A.3 R8A.2 R9A.1 | length 6.1
  Top w0.203: R8A.2@54.134,83.838 54.134,84.663 54.325,84.854 L1A.3@56.83,84.854 57.406,85.43 58.49,85.43 R9A.1@58.922,85.862
NetL1A_4: L1A.4 R1A.2 R2A.1 | length 5.7
  Top w0.203: R1A.2@54.134,88.41 54.134,87.579 54.319,87.394 L1A.4@56.83,87.394 58.838,87.394 R2A.1@58.922,87.31
NetL1B_3: L1B.3 R8B.2 R9B.1 | length 6.1
  Top w0.203: R8B.2@54.134,73.838 54.134,74.663 54.325,74.854 L1B.3@56.83,74.854 57.406,75.43 58.49,75.43 R9B.1@58.922,75.862
NetL1B_4: L1B.4 R1B.2 R2B.1 | length 5.7
  Top w0.203: R1B.2@54.134,78.41 54.134,77.579 54.319,77.394 L1B.4@56.83,77.394 58.838,77.394 R2B.1@58.922,77.31
NetL1C_3: L1C.3 R8C.2 R9C.1 | length 6.1
  Top w0.203: R8C.2@54.147,63.794 54.147,64.619 54.337,64.81 L1C.3@56.843,64.81 57.419,65.386 58.503,65.386 R9C.1@58.935,65.818
NetL1C_4: L1C.4 R1C.2 R2C.1 | length 5.7
  Top w0.203: R1C.2@54.147,68.366 54.147,67.535 54.332,67.35 L1C.4@56.843,67.35 58.851,67.35 R2C.1@58.935,67.266
NetL1D_3: L1D.3 R8D.2 R9D.1 | length 6.1
  Top w0.203: R8D.2@54.134,53.838 54.134,54.663 54.325,54.854 L1D.3@56.83,54.854 57.406,55.43 58.49,55.43 R9D.1@58.922,55.862
NetL1D_4: L1D.4 R1D.2 R2D.1 | length 5.7
  Top w0.203: R1D.2@54.134,58.41 54.134,57.579 54.319,57.394 L1D.4@56.83,57.394 58.838,57.394 R2D.1@58.922,57.31
NetL1E_3: L1E.3 R8E.2 R9E.1 | length 6.1
  Top w0.203: R8E.2@54.134,43.838 54.134,44.663 54.325,44.854 L1E.3@56.83,44.854 57.406,45.43 58.49,45.43 R9E.1@58.922,45.862
NetL1E_4: L1E.4 R1E.2 R2E.1 | length 5.7
  Top w0.203: R1E.2@54.134,48.41 54.134,47.579 54.319,47.394 L1E.4@56.83,47.394 58.838,47.394 R2E.1@58.922,47.31
NetL1F_3: L1F.3 R8F.2 R9F.1 | length 6.1
  Top w0.203: R8F.2@54.134,33.838 54.134,34.663 54.325,34.854 L1F.3@56.83,34.854 57.406,35.43 58.49,35.43 R9F.1@58.922,35.862
NetL1F_4: L1F.4 R1F.2 R2F.1 | length 5.7
  Top w0.203: R1F.2@54.134,38.41 54.134,37.579 54.319,37.394 L1F.4@56.83,37.394 58.838,37.394 R2F.1@58.922,37.31
NetL1G_3: L1G.3 R8G.2 R9G.1 | length 6.1
  Top w0.203: R8G.2@54.134,23.838 54.134,24.663 54.325,24.854 L1G.3@56.83,24.854 57.406,25.43 58.49,25.43 R9G.1@58.922,25.862
NetL1G_4: L1G.4 R1G.2 R2G.1 | length 5.7
  Top w0.203: R1G.2@54.134,28.41 54.134,27.579 54.319,27.394 L1G.4@56.83,27.394 58.838,27.394 R2G.1@58.922,27.31
NetL1H_3: L1H.3 R8H.2 R9H.1 | length 6.1
  Top w0.203: R8H.2@54.134,13.838 54.134,14.663 54.325,14.854 L1H.3@56.83,14.854 57.406,15.43 58.49,15.43 R9H.1@58.922,15.862
NetL1H_4: L1H.4 R1H.2 R2H.1 | length 5.7
  Top w0.203: R1H.2@54.134,18.41 54.134,17.579 54.319,17.394 L1H.4@56.83,17.394 58.838,17.394 R2H.1@58.922,17.31
NetLD1_1: LD1.1 R26.1
NetLD1_3: LD1.3 R28.1
NetLD2_1: LD2.1 R30.1
NetLD2_3: LD2.3 R32.1
NetLD3_1: LD3.1 R34.1
NetLD3_3: LD3.3 R35.1 | length 10.9
  Top w0.127: 10.368,92.011 10.368,92.792 10.727,93.151 10.869,93.151 11.699,93.98 11.699,94.934 11.81,95.046 12.244,95.046 12.854,95.656 16.103,95.656 16.367,95.392 16.367,95.378 16.625,95.12 16.99,95.12 17.464,95.594 R35.1@17.464,96.43
NetLD4_1: LD4.1 R38.1
NetLD4_3: LD4.3 R37.1
NetLD5_1: LD5.1 R40.1
NetLD5_3: LD5.3 R44.1
NetLD6_2: LD6.2 R114.1
NetLD7_2: LD7.2 R119.1
NetLD8_2: LD8.2 R118.1
NetR2A_2: R2A.2 R3A.1 R4A.2 | length 3
  Top w0.203: R2A.2@58.922,88.91 R4A.2@60.446,88.91 61.894,88.91 R3A.1@61.932,88.872
NetR2B_2: R2B.2 R3B.1 R4B.2 | length 3
  Top w0.203: R2B.2@58.922,78.91 61.894,78.91 R3B.1@61.932,78.872
NetR2C_2: R2C.2 R3C.1 R4C.2 | length 3
  Top w0.203: R2C.2@58.935,68.866 61.907,68.866 R3C.1@61.945,68.828
NetR2D_2: R2D.2 R3D.1 R4D.2 | length 3
  Top w0.203: R2D.2@58.922,58.91 R4D.2@60.446,58.91 61.894,58.91 R3D.1@61.932,58.872
NetR2E_2: R2E.2 R3E.1 R4E.2 | length 3
  Top w0.203: R2E.2@58.922,48.91 61.894,48.91 R3E.1@61.932,48.872
NetR2F_2: R2F.2 R3F.1 R4F.2 | length 3
  Top w0.203: R2F.2@58.922,38.91 R4F.2@60.446,38.91 61.894,38.91 R3F.1@61.932,38.872
NetR2G_2: R2G.2 R3G.1 R4G.2 | length 3
  Top w0.203: R2G.2@58.922,28.91 61.894,28.91 R3G.1@61.932,28.872
NetR2H_2: R2H.2 R3H.1 R4H.2 | length 3
  Top w0.203: R2H.2@58.922,18.91 R4H.2@60.446,18.91 61.894,18.91 R3H.1@61.932,18.872
NetR5A_1: R5A.1 SW1A.4 | length 6.4
  Top w0.203: R5A.1@46.222,83.697 R5A.1@46.264,83.655
  Top w0.762: SW1A.4@43.156,87.14 45.937,87.14 46.222,86.855 R5A.1@46.222,83.697
NetR5B_1: R5B.1 SW1B.4 | length 6.4
  Top w0.203: R5B.1@46.222,73.697 R5B.1@46.264,73.655
  Top w0.762: SW1B.4@43.156,77.14 45.937,77.14 46.222,76.855 R5B.1@46.222,73.697
NetR5C_1: R5C.1 SW1C.4 | length 6.4
  Top w0.203: R5C.1@46.235,63.653 R5C.1@46.277,63.611
  Top w0.762: SW1C.4@43.169,67.096 45.95,67.096 46.235,66.811 R5C.1@46.235,63.653
NetR5D_1: R5D.1 SW1D.4 | length 6.4
  Top w0.203: R5D.1@46.222,53.697 R5D.1@46.264,53.655
  Top w0.762: SW1D.4@43.156,57.14 45.937,57.14 46.222,56.855 R5D.1@46.222,53.697
NetR5E_1: R5E.1 SW1E.4 | length 6.4
  Top w0.203: R5E.1@46.222,43.697 R5E.1@46.264,43.655
  Top w0.762: SW1E.4@43.156,47.14 45.937,47.14 46.222,46.855 R5E.1@46.222,43.697
NetR5F_1: R5F.1 SW1F.4 | length 6.4
  Top w0.203: R5F.1@46.222,33.697 R5F.1@46.264,33.655
  Top w0.762: SW1F.4@43.156,37.14 45.937,37.14 46.222,36.855 R5F.1@46.222,33.697
NetR5G_1: R5G.1 SW1G.4 | length 6.4
  Top w0.203: R5G.1@46.222,23.697 R5G.1@46.264,23.655
  Top w0.762: SW1G.4@43.156,27.14 45.937,27.14 46.222,26.855 R5G.1@46.222,23.697
NetR5H_1: R5H.1 SW1H.4 | length 6.4
  Top w0.203: R5H.1@46.222,13.697 R5H.1@46.264,13.655
  Top w0.762: SW1H.4@43.156,17.14 45.937,17.14 46.222,16.855 R5H.1@46.222,13.697
NetR9A_2: R9A.2 R10A.1 R11A.2 | length 3.1
  Top w0.203: R9A.2@58.922,84.262 R11A.2@60.446,84.262 61.716,84.262 R10A.1@61.932,84.046
NetR9B_2: R9B.2 R10B.1 R11B.2 | length 3.1
  Top w0.203: R9B.2@58.922,74.262 61.716,74.262 R10B.1@61.932,74.046
NetR9C_2: R9C.2 R10C.1 R11C.2 | length 3.1
  Top w0.203: R9C.2@58.935,64.218 61.729,64.218 R10C.1@61.945,64.002
NetR9D_2: R9D.2 R10D.1 R11D.2 | length 3.1
  Top w0.203: R9D.2@58.922,54.262 61.716,54.262 R10D.1@61.932,54.046
NetR9E_2: R9E.2 R10E.1 R11E.2 | length 3.1
  Top w0.203: R9E.2@58.922,44.262 61.716,44.262 R10E.1@61.932,44.046
NetR9F_2: R9F.2 R10F.1 R11F.2 | length 3.1
  Top w0.203: R9F.2@58.922,34.262 R11F.2@60.446,34.262 61.716,34.262 R10F.1@61.932,34.046
NetR9G_2: R9G.2 R10G.1 R11G.2 | length 3.1
  Top w0.203: R9G.2@58.922,24.262 61.716,24.262 R10G.1@61.932,24.046
NetR9H_2: R9H.2 R10H.1 R11H.2 | length 3.1
  Top w0.203: R9H.2@58.922,14.262 R11H.2@60.446,14.262 61.716,14.262 R10H.1@61.932,14.046
NetR26_2: R26.2 T1.3 | length 3.6
  Top w0.203: T1.3@11.264,92.03 11.364,91.93 12.014,91.93 12.764,91.18 R26.2@12.764,89.48
NetR28_2: R28.2 T2.3 | length 2.4
  Top w0.203: T2.3@14.764,90.53 15.464,90.53 15.814,90.18 R28.2@15.814,88.93
NetR30_2: R30.2 T3.3 | length 2.3
  Top w0.203: T3.3@18.514,90.43 19.014,90.43 19.264,90.18 19.264,89.03 R30.2@19.064,88.83
NetR32_2: R32.2 T4.3 | length 2.4
  Top w0.203: T4.3@22.514,90.43 23.264,90.43 23.314,90.38 R32.2@23.314,88.83
NetR34_2: R34.2 T5.3
NetR37_2: R37.2 T6.3
NetR40_2: R40.2 T7.3 | length 0.2
  Top w0.203: T7.3@10.614,12.93 T7.3@10.764,13.08
NetR44_2: R44.2 T8.3
NetR101_1: R101.1 T10.3
NetR102_1: R102.1 R157.2 T10.1
NetR111_1: R111.1 T11.3
NetRN1A_4: RN1A.4 RN1A.8 | length 8.1
  Top w0.203: RN1A.8@74.594,87.31 74.594,85.515 75.499,84.61 76.867,84.61 76.916,84.659 77.312,84.659 78.404,83.567 RN1A.4@78.404,81.91
NetRN1A_5: RN1A.5 RN1A.6 | length 4
  Top w0.203: RN1A.6@77.128,87.407 77.128,86.066 77.364,85.83 77.989,85.83 78.398,86.239 RN1A.5@78.398,87.407
NetRN1B_4: RN1B.4 RN1B.8 | length 8.1
  Top w0.203: RN1B.8@74.594,77.31 74.594,75.515 75.499,74.61 76.867,74.61 76.916,74.659 77.312,74.659 78.404,73.567 RN1B.4@78.404,71.91
NetRN1B_5: RN1B.5 RN1B.6 | length 4
  Top w0.203: RN1B.6@77.128,77.407 77.128,76.066 77.364,75.83 77.989,75.83 78.398,76.239 RN1B.5@78.398,77.407
NetRN1C_4: RN1C.4 RN1C.8 | length 8.1
  Top w0.203: RN1C.8@74.607,67.266 74.607,65.471 75.512,64.566 76.88,64.566 76.928,64.615 77.325,64.615 78.417,63.523 RN1C.4@78.417,61.866